# Altium PCB PCB4.pcbdoc
Units mil, origin at the board's own origin, x right, y up, seen from the top; angles counter-clockwise.
Board outline 4642.01 x 2468.5 mil, 4 copper layers (Top Layer, GND, PWR, Bottom Layer), stack 53.912 mil thick; 55 components, 34 nets, 205 pads, 4 vias.
Unrouted connection lines stored in the file: 35.
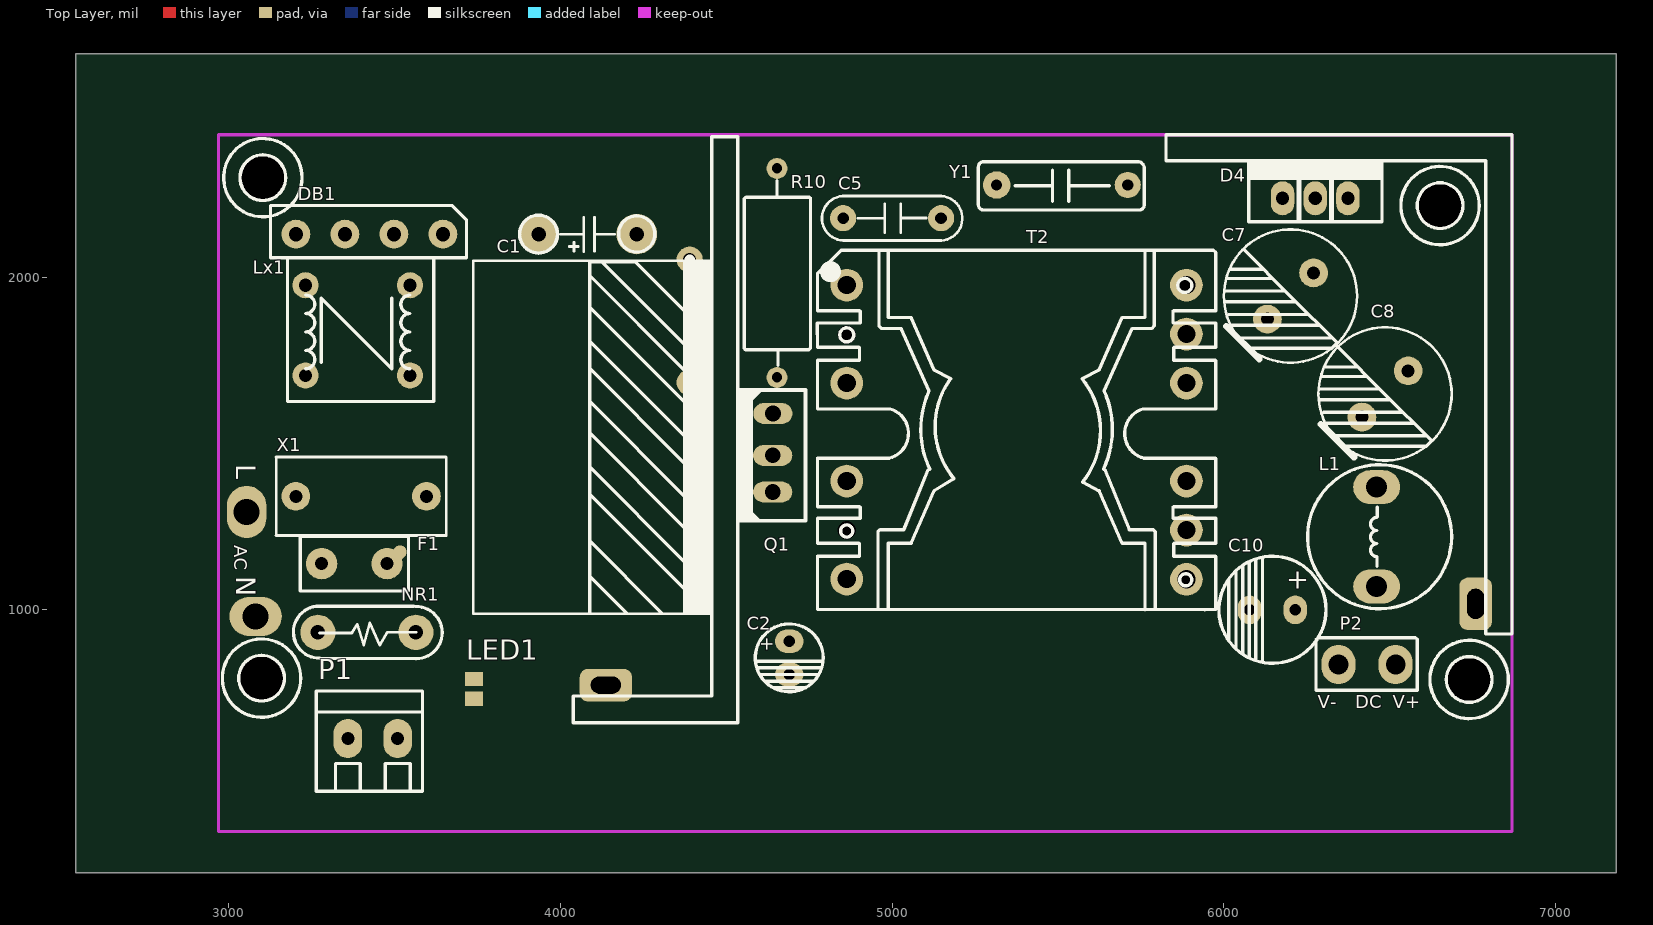
[diagram p0: Top Layer view]
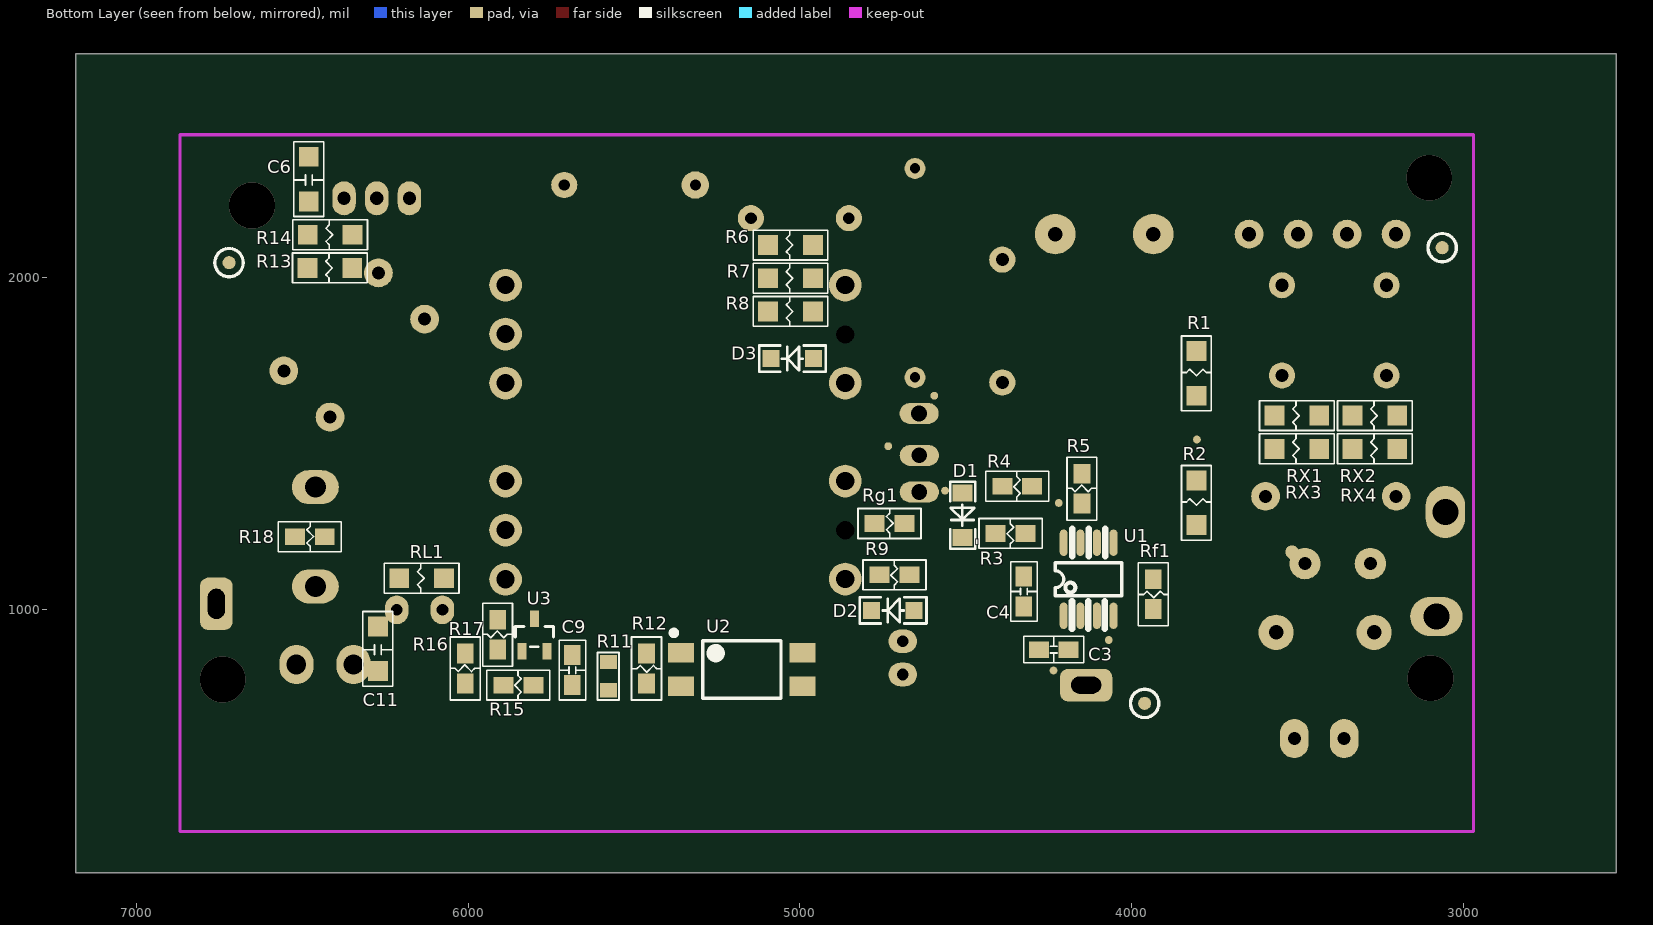
[diagram p1: Bottom Layer view, seen from below]
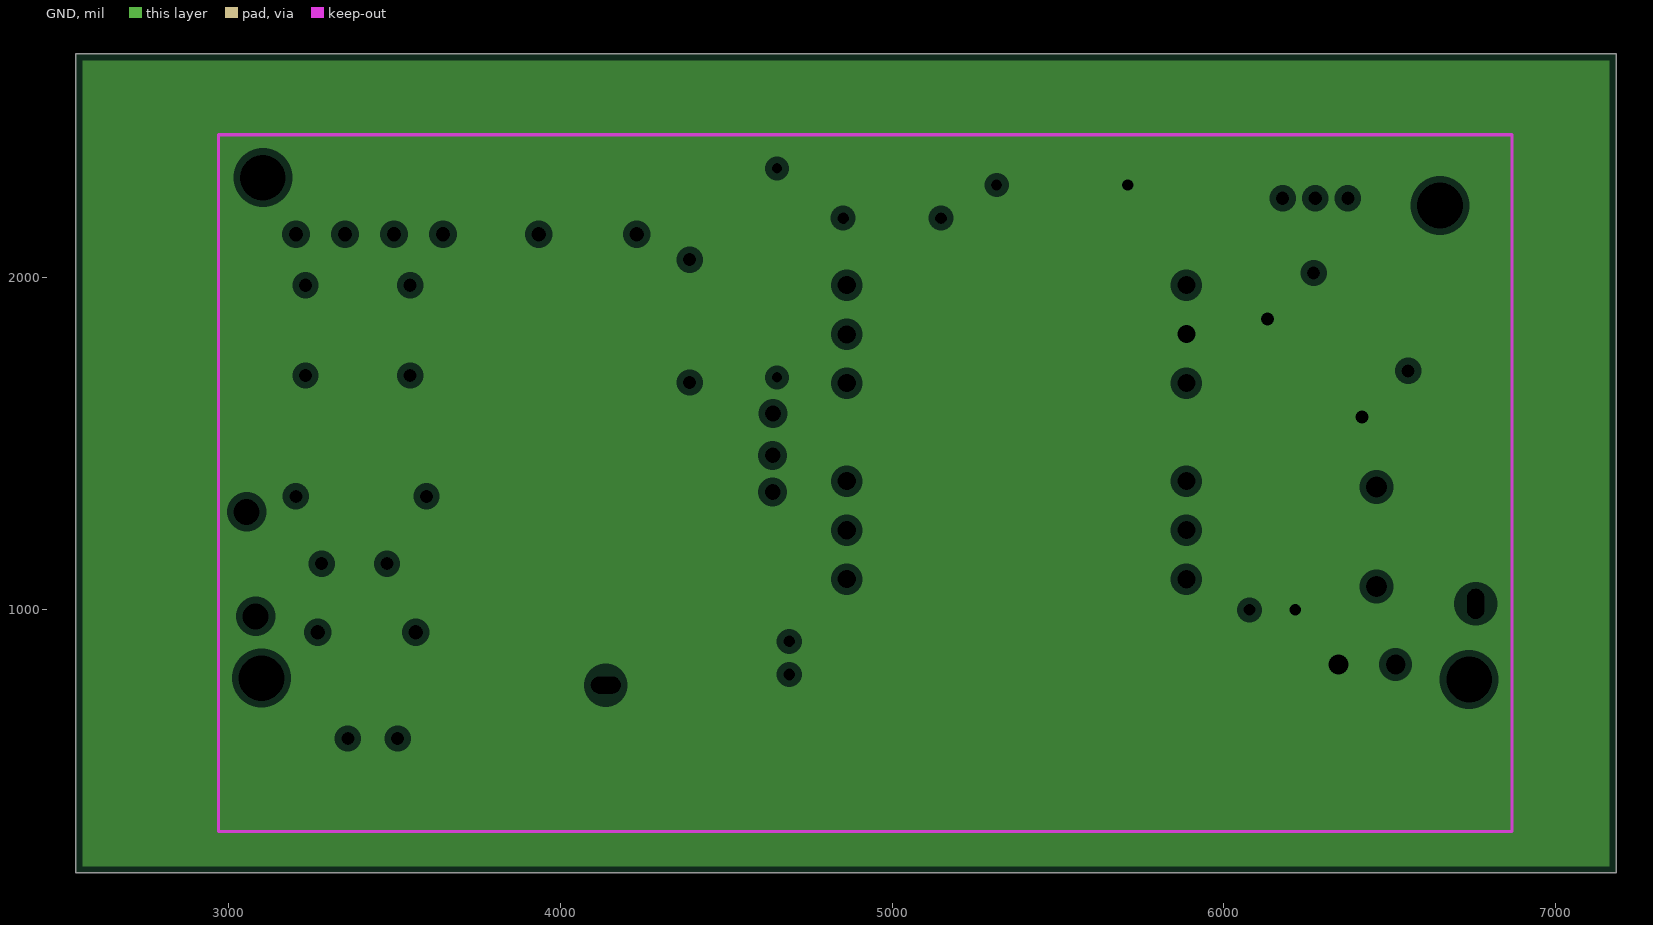
[diagram p2: GND, clearances drawn from the general rule]
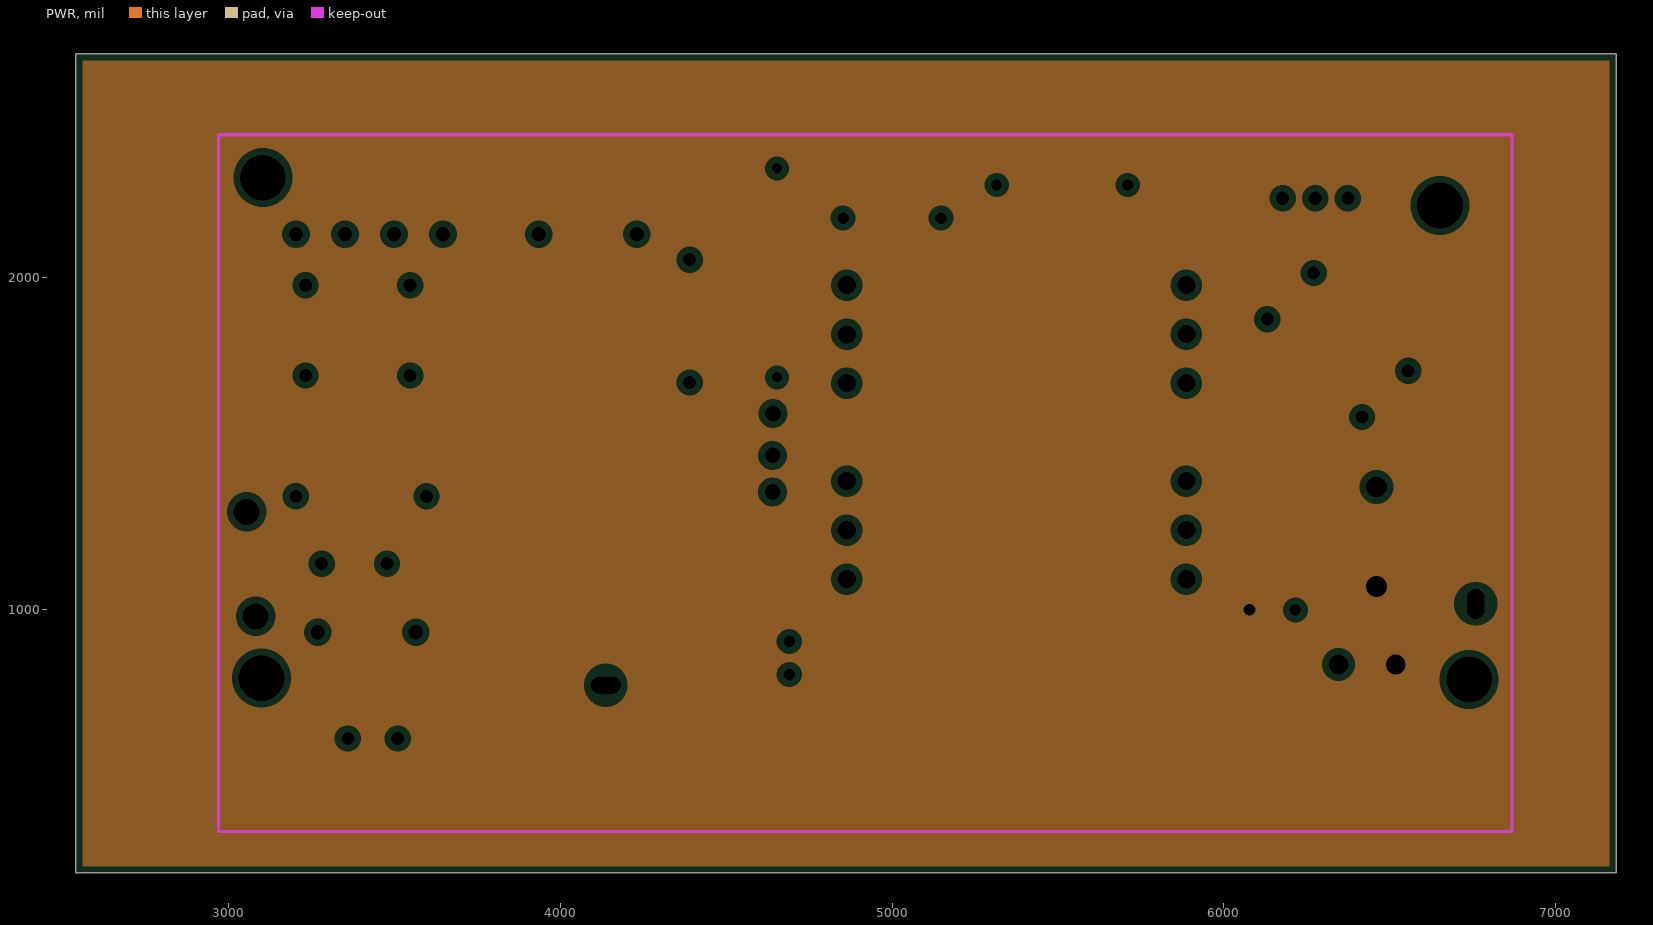
[diagram p3: PWR, clearances drawn from the general rule]

## Layer stack, top to bottom
Top Solder: solder mask 1, SM-001, Dk 4
Top Layer: signal copper 1.378
Dielectric 1: prepreg 5.1, PP-017, Dk 4.3
Dielectric 2: prepreg 5.1, PP-017, Dk 4.3
GND: plane copper 1.378, net GND
Dielectric 3: core 28, Core-039, Dk 4.8
PWR: plane copper 1.378, net VCC
Dielectric 4: prepreg 5.1, PP-017, Dk 4.3
Dielectric 5: prepreg 5.1, PP-017, Dk 4.3
Bottom Layer: signal copper 1.378
Bottom Solder: solder mask 1, SM-001, Dk 4

## Board outline
7182.01,205 2540,205 2540,2673.5 7182.01,2673.5

## Design rules (kind name [scope] priority, off if disabled: settings)
Clearance [All] p1: gap=0 ignorepadtopadclearanceinfootprint=TRUE
ComponentClearance [All] p1: gap=0 collisioncheckmode=3 verticalgap=0 showdistances=FALSE
HoleSize [All] p1: absolutevalues=TRUE maxlimit=130 minlimit=1 maxpercent=80.000 minpercent=20.000
HoleToHoleClearance [All] p1: gap=1 allowstackedmicrovias=TRUE
MinimumSolderMaskSliver [All] p1: minsoldermaskwidth=0
PlaneClearance [All] p1: clearance=20
PlaneConnect [All] p1: planeconnectstyle=Relief reliefexpansion=20 reliefentries=4 reliefconductorwidth=10 reliefairgap=10
PolygonConnect [All] p1: connectstyle=Relief reliefconductorwidth=10 reliefentries=4 polygonreliefangle="90 Angle" airgapwidth=10
RoutingVias [All] p1: holewidth=28 width=50 viastyle="Through Hole" minholewidth=28 minwidth=50 maxholewidth=28 maxwidth=150
SilkToSilkClearance [All] p1: silktosilkclearance=0
SilkToSolderMaskClearance [IsPad] p1: minsilkscreentomaskgap=0 clearancetoexposedcopper=TRUE
SolderMaskExpansion [All] p1: expansion=4 istentingtop=FALSE
Width [All] p1: maxlimit=99 minlimit=1 preferedwidth=10
22 further rules are at their usual default settings.

## Components (designator, comment, footprint, x,y, rotation, side; value= is the part's Value field where it differs from the comment)
C1 "100uf" "Cin /400V/56uF Wo" 3737.37,2049.29 r0 top
C2 "47uF/50V" "C Φ5*11 L=2.5" 4690,853 r270 top value=10uF/50V
C3 "103/0805" 0805-C 4280.08,877.55 r180 bottom
C4 "104/0805" 0805-C 4325.45,1098.08 r270 bottom value=104/1206
C5 "630V222" CBB=7.5MM 5000,2178 r0 top value=1000V103
C6 "472" 1206-C 6480.3,2363.08 r270 bottom value=102
C7 "1000uF/16V" "C 1000UF/16V" 6555,1718 r225 top value=2200uF/25V
C8 "1000uF/16V" "C 1000UF/16V" 6270,2013 r225 top value=2200uF/25V
C9 "104/0805" 0805-C 5686,861.27 r270 bottom
C10 "470uF/25V" "C= 3.5MM 8*15" 6077.2,998 r90 top locked value=2200uF/25V
C11 "104" 1206-C 6272.17,948 r270 bottom
D1 "1N4148" "D 1N4148" 4510,1283 r90 bottom
D2 "FR104" D/SOD123 4656.02,996 r0 bottom
D3 "FR107" D/SOD123 4959.25,1755 r0 bottom
D4 "MBR20100" "D TO-220" 6275,2238 r0 top
DB1 "KBP307" "DB D=1.1MM" 3425,2130 r0 top
F1 "250V/3.15A" "F 3.15A L=5MM" 3380,1135 r0 top
L1 "4uH" L=7.6MM 6460,1218 r90 top locked
LED1 "LED1" C0805 3740,760 r90 top
Lx1 "18mH" LF=6.9MM 3390,1840 r0 top
NR1 "8D-11" NTC=7.5mm 3565,930 r90 top
P1 "Plug AC Male" KF128-3.81-2P 3435,610 r0 top
P2 "12V5A" OUT 6517,835 r270 top
Q1 "SJMN60R38F" MOSFET1 4640,1353 r90 top
R1 "750K/1206" 1206-R 3804.55,1642.92 r90 bottom
R2 "750K/1206" 1206-R 3804.55,1252.92 r90 bottom
R3 "22R/0805" 0805-R 4410,1228 r180 bottom value=30R/1206
R4 "47R/0805" 0805-R 4390,1370 r180 bottom value=/47R/1206
R5 "100R/0805" 0805-R 4150,1408 r270 bottom value=390/1206
R6 "50K/2510/1W" 1206-R 4960.9,1997.45 r0 bottom value=100K/2W
R7 "50K/2510/1W" 1206-R 4960.9,1897.45 r0 bottom value=100K/2W
R8 "50K/2510/1W" 1206-R 4960.9,2097.45 r0 bottom value=100K/2W
R9 "22R/0805" 0805-R 4760,1103 r180 bottom
R10 "0.39/2W" "R  2W" 4653.07,2013 r90 top
R11 "1K/0805" "0805 RC" 5577.28,798 r270 bottom value=470/0805
R12 "1k/0805" 0805-R 5462.13,776.19 r90 bottom
R13 "51R/1206" 1206-R 6348.7,2028.45 r0 bottom value=68R/1206
R14 "22R/1206" 1206-R 6347.87,2128.45 r0 bottom value=47R/1206
R15 "2.2K/0805" 0805-R 5893.23,771.19 r180 bottom value=200/0805
R16 "39K/1%/0805" 0805-R 6008.39,866.19 r270 bottom
R17 "12.5K/1%/0805" 0805-R 5910.94,968 r270 bottom value=10K/1%/0805
R18 "5.1K/0805" 0805-R 6431.61,1218 r0 bottom
Rf1 "Res1" 0805-R 3935,1000 r90 bottom value=24K
Rg1 "10K/0805" 0805-R 4685,1258 r0 bottom value=10K/1206
RL1 "3.3K/1206" 1206-R 6072.12,1093.45 r0 bottom value=750K/1206
RX1 "1M/1206*4" 1206-R 3199.92,1483.45 r0 bottom value=1M/1206
RX2 "1M/1206" 1206-R 3199.92,1583.45 r0 bottom
RX3 "1M/1206" 1206-R 3434.92,1483.45 r0 bottom
RX4 "1M/1206" 1206-R 3434.92,1583.45 r0 bottom
T2 "PQ2620" "T PQ2620" 5590,1318 r0 top locked
U1 "OB2269CP" OB2269 4205,980 r90 bottom
U2 "PC817B" LC-SMD-4 5175,818 r180 bottom
U3 "TL431" LC-SOT-23(SOT-23-3) 5799.72,922.21 r180 bottom
X1 "224" CX=10mm 3400,1340 r180 top value=0.22uF
Y1 "222" Y1 5315,2278 r0 top

## Footprints (in the part's own frame and the unit in brackets; to place one, negate y for a bottom-side part, rotate by r counter-clockwise, add the part's x,y. Pads: shape width x height; smd on the part's side, far side on the other; paste and mask are expansions set on the pad)
"0805 RC" [mm]
  rect 1.1x1.3 smd: 1(-1.088,0) 2(1.088,0)
  silkscreen extent -1.81,-0.83 1.81,0.82
0805-C [mil]
  rect 60x50 smd: 1(0.08,0.45) 2(90.08,0.45)
  silkscreen extent -45,-40 135,40
0805-R [mil]
  rect 60x50 smd: 1(0,0) 2(90,0)
  silkscreen extent -50,-45 140,45
1206-C [mil]
  rect 60x60 smd: 1(0.08,0.45) 2(135.08,0.45)
  silkscreen extent -45,-45 180,45
1206-R [mil]
  rect 60x60 smd: 1(0.08,0.45) 2(135.08,0.45)
  silkscreen extent -45,-45 180,45
C0805 [mm] "Chip Capacitor, Body 2.0x1.3mm, IPC High Density"
  rect 1.1x1.4 smd: 1(-0.75,0) 2(0.75,0)
  body extent -1.1,-0.72 1.1,0.72, height 1.4
"C 1000UF/16V" [mm]
  round 2.2 hole 1: 1(5,0) 2(0,0)
  silkscreen extent -2.6,-5.1 7.6,5.1
"C Φ5*11 L=2.5" [mm]
  oval 1.8x2.2 hole 0.9: 1(-1.27,0) 2(1.27,0)
  silkscreen extent -2.6,-2.6 2.6,2.6
"C= 3.5MM 8*15" [mm]
  oval 2.2x1.8 hole 0.9: 1(0,-3.5) 2(0,0)
  silkscreen extent -4.1,-5.85 4.1,2.35
CBB=7.5MM [mm]
  round 2 hole 0.9: 1(-3.75,0) 2(3.75,0)
  silkscreen extent -5.37,-1.71 5.37,1.7
"Cin /400V/56uF Wo" [mm]
  round 3.1 hole 1.1: 1(5.02,2.05) 2(12.52,2.05)
  silkscreen extent 0,-27 18.07,3.5
CX=10mm [mm]
  round 2.2 hole 1: 1(5,0) 2(-5,0)
  silkscreen extent -6.5,-3 6.5,3
"D 1N4148" [mm]
  rect 1.3x1.5 smd: +(1.713,0) -(-1.713,0)
  silkscreen extent -2.56,-0.96 2.56,0.95
"D TO-220" [mm]
  oval 1.8x2.6 hole 1: 1(-2.5,0) 1(2.5,0) 2(0,0)
  silkscreen extent -5.1,-1.8 5.1,2.7
D/SOD123 [mm]
  rect 1.3x1.3 smd: 1(0,0) 2(3.248,0)
  silkscreen extent -0.95,-1 4.15,1
"DB D=1.1MM" [mm]
  round 2.2 hole 1.1: +(5.625,0) -(-5.625,0) L(-1.875,0) N(1.875,0)
  silkscreen extent -7.58,-1.81 7.42,2.19
"F 3.15A L=5MM" [mm]
  round 2.4 hole 1: 1(-2.512,0.05) 2(2.487,0.05)
  round 0 all layers, no hole: ""(-3.062,-0.525)
  oval 1x2.2 all layers, no hole rot 135: ""(3.063,0.525)
  silkscreen extent -4.16,-2.05 4.14,2.15
KF128-3.81-2P [mm] "螺钉式接线端子，脚距3.81mm"
  oval 2.2x3 hole 1: 1(-1.905,0) 2(1.905,0)
  silkscreen extent -4.32,-4.04 3.81,3.63, body extent -4.31,-3.9 3.81,3.5, height 8.55
L=7.6MM [mm]
  oval 2.6x3.6 hole 1.6: 1(3.8,0) 2(-3.8,0)
  silkscreen extent -5.51,-5.74 5.51,5.28
LC-SMD-4 [mm]
  rect 2x1.5 smd: A(-4.65,1.27) C(4.65,1.27) E(4.65,-1.27) K(-4.65,-1.27)
  silkscreen extent -5.4,-2.2 3,3, body extent -5.02,-2.42 5.01,2.42, height 3.9
LC-SOT-23(SOT-23-3) [mm]
  rect 0.7x1.25 smd: A(0,1.25) K(0.95,-1.25) R(-0.95,-1.25)
  silkscreen extent -1.46,-0.9 1.46,0.65, body extent -1.5,-1.5 1.5,1.5, height 1.3
LF=6.9MM [mm]
  round 2 hole 1: 1(4,-3.45) 2(4,3.45) 3(-4,-3.45) 4(-4,3.45)
  silkscreen extent -5.38,-5.45 5.81,5.56
MOSFET1 [mm]
  oval 1.6x3 hole 1.2: D(2.799,-0.005) G(0,0) S(6.012,-0.02)
  silkscreen extent -2.2,-2.51 7.86,2.49
NTC=7.5mm [mm]
  round 2.7 hole 1.1: 1(0,0) 2(0,7.5)
  silkscreen extent -2.02,-2.01 2.02,9.38
OB2269 [mil]
  oval 80x24 smd: 1(0,0) 2(0,-50) 3(0,-100) 4(0,-150) 5(220,-150) 6(220,-100) 7(220,-50) 8(220,0)
  silkscreen extent -40,-175 262,25
OUT [mm]
  oval 3x2.6 hole 1.5: GND(0.051,-4.369) VCC(0.051,0)
  silkscreen extent -2.01,-6.1 2.01,1.65
"R  2W" [mm]
  round 1.6 hole 0.8: 1(8,0) 2(-8,0)
  silkscreen extent -7.09,-2.57 7.06,2.5
"T PQ2620" [mm]
  round 2.5 hole 1.4: 1(-18.461,16.724) 3(-18.461,9.223) 4(-18.461,1.723) 6(-18.461,-5.776) 7(7.539,-5.802) 8(7.539,-2.026) 9(7.539,1.723) 10(7.539,9.224) 11(7.539,12.974) 12(7.539,16.724)
  round 0 hole 1.4: 2(-18.461,12.949) 5(-18.461,-2.052)
  silkscreen extent -20.71,-8.11 9.78,19.39
Y1 [mm]
  round 2.1 hole 0.85: 1(0,0)
  round 2 hole 0.85: 2(10.033,0)
  silkscreen extent -1.4,-1.91 11.3,1.79

## Part data
C1 C2 C7 C8 C10: library part "Cap Pol2", "Polarized Capacitor (Axial)", LatestRevisionDate=17-Jul-2002, LatestRevisionNote="Re-released for DXP Platform.", PackageDescription="Polarized Capacitor; 2 Leads", PackageReference=POLAR0.8, Published=8-Jun-2000, Publisher="Altium Limited"
C3 C4 C5 C6 C9 C11 X1 Y1: library part Cap, "Capacitor", LatestRevisionDate=17-Jul-2002, LatestRevisionNote="Re-released for DXP Platform.", PackageDescription="Radial Cap, Thru-Hole; 2 Leads; 0.3 in Pin Spacing", PackageReference=RAD-0.3, Published=8-Jun-2000, Publisher="Altium Limited"
D1 D2 D3 D4: library part "Diode BAS116", "Silicon Low Leakage Diode", ComponentLink1Description="Manufacturer Link", ComponentLink1URL=http://www.infineon.com/, ComponentLink2Description=Datasheet, ComponentLink2URL=http://www.infineon.com/upload/Document/cmc_upload/documents/080/656/bas116series.pdf, DatasheetVersion=Oct-1999, LatestRevisionDate=29-May-2009, LatestRevisionNote="IPC-7351 Footprint Added.", Note="Pin 2 is not connected and not drawn.", PackageDescription="3-Pin SOT-23 Package 0.95 mm Pitch, 2.5 mm Lead Span", PackageReference=SOT-23, PackageVersion=Sep-2001, Published=21-Mar-2003, Publisher="Altium Limited"
DB1: library part Bridge1, "Full Wave Diode Bridge", DatasheetVersion=E2732B, LatestRevisionDate=29-May-2009, LatestRevisionNote="Sch pins A & K swapped.", PackageDescription="Bridge Rectifier; 4 Terminals; Body 9.4 x 9.4 mm (typ); Pitch 5.08 mm", PackageReference=D-38, Published=8-Jun-2000, Publisher="Altium Limited"
F1: library part "Fuse 2", "Fuse", LatestRevisionDate=17-Jul-2002, LatestRevisionNote="Re-released for DXP Platform.", PackageDescription="Thru-Hole; 2 Leads", PackageReference=PIN-W2/E2.8, Published=8-Jun-2000, Publisher="Altium Limited"
L1: library part Inductor, "Inductor", Code_IEC=1005, Code_JEITA=0402, LatestRevisionDate=29-May-2009, LatestRevisionNote="IPC-7351 Footprint Added.", PackageDescription="Chip Inductor", PackageReference=0402-A, Published=8-Jun-2000, Publisher="Altium Limited"
LED1: library part LED2, "Typical RED, GREEN, YELLOW, AMBER GaAs LED", LatestRevisionDate=17-Jul-2002, LatestRevisionNote="Re-released for DXP Platform.", PackageDescription="SM LED; 2 Flat Leads", PackageReference=3.2X1.6X1.1, PackageVersion=Feb-2002, Published=8-Jun-2000, Publisher="Altium Limited"
Lx1: library part "Trans Ideal", "Transformer (Ideal)", LatestRevisionDate=17-Jul-2002, LatestRevisionNote="Re-released for DXP Platform.", PackageDescription="Transformer; 4 Leads", PackageReference=TRF_4, Published=8-Jun-2000, Publisher="Altium Limited"
NR1: library part NTC
P1: "IEC Mains Power Inlet, EN60 320-1 C14 Class I Cold Condition, PC Flange Rear Mount, Chassis Plug", MaximumRating="10A, 250V a.c. (UL & CSA 15A, 250V a.c.)", PackageDocument="ver.80, 15-Sep-2003", ComponentLink1Description="Manufacturer Link", ComponentLink1URL=http://www.bulgin.co.uk/, DatasheetDocument="ver.80, 15-Sep-2003", DrillSize="Corresponds to nominal value.", LatestRevisionDate=15-Jul-2004, LatestRevisionNote="Component Replaced.", MountingFixtures="Not drawn on schematic symbol.", Note="IEC Color Scheme employed for L, N and E.", PackageReference=PX0580/PC, PCB_Layout="Complies with manufacturer's recommendation.", Published=15-Jul-2004, Publisher="Altium Limited", Terminations="P.C. Spills"
P2: library part "Header 2", "Header, 2-Pin", LatestRevisionDate=17-Jul-2002, LatestRevisionNote="Re-released for DXP Platform.", Publisher="Altium Limited"
Q1: library part NMOS-2, "N-Channel Power MOSFET", ComponentLink1Description="Manufacturer Link", ComponentLink1URL=http://www.irf.com/, DatasheetVersion=PD-9.814, LatestRevisionDate=17-Jul-2002, LatestRevisionNote="Re-released for DXP Platform.", Note="Pin 2 is electrically connected to pin 4.", PackageDescription="TO, Thru-Hole, Vertical, Heatsink Mounted; 3 In-Line Leads; Pitch 2.54 mm", PackageReference=TO-220AB, PackageVersion=Feb-1997, Published=8-Jun-2000, Publisher="Altium Limited"
R1 R2 R3 R4 R5 R6 R7 R8 R9 R10 R11 R12 R13 R14 R15 R16 R17 R18 Rg1 RL1 RX1 RX2 RX3 RX4: library part Res1, "Resistor", LatestRevisionDate=17-Jul-2002, LatestRevisionNote="Re-released for DXP Platform.", PackageDescription="Axial Device, Thru-Hole; 2 Leads; 0.3 in Pin Spacing", PackageReference=AXIAL-0.3, Published=8-Jun-2000, Publisher="Altium Limited"
Rf1: "Resistor", LatestRevisionDate=17-Jul-2002, LatestRevisionNote="Re-released for DXP Platform.", PackageDescription="Axial Device, Thru-Hole; 2 Leads; 0.3 in Pin Spacing", PackageReference=AXIAL-0.3, Published=8-Jun-2000, Publisher="Altium Limited"
T2: library part T
U2: library part Optoisolator1, "4-Pin Phototransistor Optocoupler", DatasheetVersion=Nov-2003, LatestRevisionDate=04-Mar-2005, LatestRevisionNote="Sch pins 3 & 4 Swapped.", PackageReference=DIP-4, Published=24-Mar-1999, Publisher="Altium Limited"

## Free pads (board coordinates)
  oval 118.11x157.48 hole 78.74: 1(3055,1293)
  oval 157.48x118.11 hole 78.74: 1(3082.2,978)
  round 78.74 hole 39.37: 2(4390,2053) 3(4390,1683)
  round 39.37 smd far side: 6(3064.49,2089) 6(3961.14,716) 6(6720,2044)
  round 23.62 smd far side: 6(3803.66,1511) 6(4069.41,907) 6(4220,1320) 6(4235.75,815) 6(4562.52,1357) 6(4595,1643) 6(4733.78,1491)
  rrect50% 157.48x98.43 hole 51.18 slot 90.55 at 0 deg: 126(4137.32,771)
  rrect50% 98.43x157.48 hole 51.18 slot 90.55 at 90 deg: 126(6758.39,1016)
  oct 78.74x39.37 on Bottom Solder rot 45: ""(6077.22,1219.98) ""(6077.35,1297.02) ""(6147.1,1290.98) ""(6148.21,1366.02) ""(6214.03,1360.98) ""(6216.13,1440.02) ""(6282.93,1429.98) ""(6289.94,1517.02) ""(6349.86,1500.98) ""(6574.27,1367.98) ""(6628.53,1319.02)
  oct 78.74x39.37 on Bottom Solder rot 135: ""(6105.83,940) ""(6145.2,900) ""(6182.52,861.73) ""(6188.5,1730) ""(6199.33,1804) ""(6223.86,821.73) ""(6260.35,1657) ""(6268.23,1737) ""(6269.21,1919) ""(6328.27,1596) ""(6328.27,1937) ""(6335.81,1856.33) ""(6345,1665) ""(6402.41,1793.67) ""(6404.06,1865) ""(6404.06,1932) ""(6469.02,1731) ""(6470.98,1865) ""(6479.76,941.73) ""(6482.8,1790) ""(6515.2,906.73) ""(6542.83,1804) ""(6616.65,1759.91) ""(6645.2,1678.91)
  oct 78.74x39.37 on Bottom Solder: ""(6287.75,1043.52) ""(6298.9,1122.48) ""(6334.17,957) ""(6367.8,1041.48) ""(6383.55,1123.48) ""(6388.31,957) ""(6436.54,957) ""(6541.31,1299.23)
  oct 39.37x78.74 on Bottom Solder: ""(6536.52,1443.13) ""(6536.52,1535.63) ""(6536.52,1628.13) ""(6601.32,1537.87) ""(6601.32,1633.87) ""(6603.29,1448.87) ""(6666.68,1408.31) ""(6668.65,1505.31) ""(6668.65,1597.31)

## Via types
v1: diameter 137.8, hole 137.8, Top Layer to Bottom Layer, 4 vias

## Nets (pads, with @x,y where several pads share a name; then routed paths per layer and width w, separated by ;. In a path a pad name is that pad's centre, name@x,y a point inside that pad or via, vN(x,y) a via of type N, cw(c..) or ccw(c..) an arc to the next point about the centre after c; other vN are vias at no path point)
GND: C7.1 C8.1 C10.1 C11.2 LED1.2 P2.GND R17.1 RL1.1 T2.11 U3.A Y1.2
GND1: C1.2 C2.2 C3.1 C4.2 DB1.- R10.1 Rf1.2 Rg1.2 T2.4 U1.1 U2.E Y1.1
NETC1_1: C1.1 C5.1 DB1.+ R1.2 R6.1 R7.1 R8.1 T2.1
NETC2_1: C2.1 C4.1 D2.2 U1.7
NETC3_2: C3.2 U1.2 U2.C
NETC5_2: C5.2 D3.2 R6.2 R7.2 R8.2
NETC6_1: C6.1 D4.1 T2.8
NETC6_2: C6.2 R13.2 R14.2
NETC7_2: C7.2 C8.2 D4.2 L1.1 R11.2 R13.1 R14.1
NETC9_1: C9.1 R12.1 U2.K U3.K
NETC9_2: C9.2 R15.2
NETD1_+: D1.+ Q1.G R4.1 Rg1.1
NETD1_-: D1.- R3.1
NETD2_1: D2.1 R9.2
NETD3_1: D3.1 Q1.D T2.3
NETDB1_L: DB1.L Lx1.2
NETDB1_N: DB1.N Lx1.4
NETF1_1: F1.1 P1.1
NETF1_2: F1.2 Lx1.3 RX1.1 RX2.1 X1.1
NETLED1_1: LED1.1 R18.1
NetLx1_1: Lx1.1 NR1.1 RX3.2 RX4.2 X1.2
NETNR1_2: NR1.2 P1.2
NETQ1_S: Q1.S R5.1 R10.2
NETR1_1: R1.1 R2.2
NETR2_1: R2.1 U1.3
NETR3_2: R3.2 R4.2 U1.8
NETR5_2: R5.2 U1.6
NETR9_1: R9.1 T2.6
NETR11_1: R11.1 R12.2 U2.A
NETR15_1: R15.1 R16.1 R17.2 U3.R
NETRF1_1: Rf1.1 U1.4
NETRX1_2: RX1.2 RX3.1
NETRX2_2: RX2.2 RX4.1
VCC: C10.2 C11.1 L1.2 P2.VCC R16.2 R18.2 RL1.2
pads on no net: F1. T2.2 T2.5 T2.7 T2.9 T2.10 T2.12 U1.5
copper on no net:
  other v1: 6738.7,788 3099.92,792 6651.1,2216 3103.86,2300

## Polygon pours and split planes (outlines as drawn)
GND on GND (split plane): 7161.91,225.1 2560.1,225.1 2560.1,2653.41 7161.91,2653.41
VCC on PWR (split plane): 7161.91,225.1 2560.1,225.1 2560.1,2653.41 7161.91,2653.41

## Keep-outs
Keep-Out Layer:
  lines w10: 2970,330 6867.64,330 6867.64,2429.65 2970,2429.65 2970,330

## Silkscreen, mask and mechanical layers (free items; w line width, h text height)
Top Overlay:
  circle w10: c6651.1,2216 r118.11
  circle w10: c6651.1,2216 r68.9
  circle w10: c6738.7,788 r118.11
  circle w10: c6738.7,788 r68.9
  circle w10: c3103.86,2300 r118.11
  circle w10: c3103.86,2300 r68.9
  circle w10: c3099.92,792 r68.9
  circle w10: c3099.92,792 r118.11
  lines w10: 4040.87,658 4535,658 ; 6062.64,2350.91 6788.9,2350.91 ; 4535,658 4038.9,658 4038.9,738 4456.26,738 4456.26,2423 4535,2423 4535,658 ; 6788.9,2350.91 5825,2350.91 5825,2429.65 6867.64,2429.65 6867.64,925 6788.9,925 6788.9,2350.91
  lines w31.5: 4390,1683 4390,2053
  text "L" at 3023.15,1436 h59.06 r270
  text "AC" at 3017.24,1192 h39.37 r270
  text "N" at 3023.15,1099 h59.06 r270
  text "V-" at 6282.99,702 h39.37
  text "DC" at 6396.18,702 h39.37
  text "V+" at 6508.39,702 h39.37
Bottom Overlay:
  circle w10: c3064.49,2089 r42.75
  circle w10: c6720,2044 r42.75
  circle w10: c3961.14,716 r42.75
Bottom Solder:
  circle w19.68: c3064.49,2089 r29.53
  circle w19.68: c6720,2044 r29.53
  circle w19.68: c3961.14,716 r29.53
  lines w39.37: 5886.81,1385.85 5889.23,1385.85 ; 6077.2,998 6077.2,1219.97 6077.22,1219.98 ; 6270,2013 6275,2018 6275,2238 ; 6370.59,2240.84 6373.43,2238 ; 6474.87,2357 6477.87,2360
  text "DESIGN:ZYC" at 3960.16,2327 h59.06
Mechanical 1:
  circle w7.87: c5394.21,1298 r39.37
  circle w7.87: c5394.21,1175.5 r39.37
  circle w7.87: c5394.21,1053 r39.37
  circle w7.87: c5394.21,1420.5 r39.37
  circle w7.87: c5539.88,2023 r39.37
  circle w7.87: c5534.96,1888 r39.37
  circle w7.87: c5475.91,1778 r39.37
  circle w7.87: c5394.21,1678 r39.37
  circle w7.87: c5394.21,1543 r39.37

## Text inside footprints (layer, text, board x,y; h text height)
C2: Top Overlay "+" at 4640,871 h39.37 r90
C10: Top Overlay "+" at 6188.2,1062 h60
D1: Bottom Overlay "-" at 4451.93,1192.94 h39.37 r270